# Altium PCB EFR32xG27_BLE_AGR_REF_DES_A00.PcbDoc (part 2 of 2)
Units mil, origin at the board's own origin, x right, y up, seen from the top; angles counter-clockwise.
Board outline 1488.66 x 1256.89 mil, 2 copper layers (Top Layer, Bottom Layer), stack 38.548 mil thick; 113 components, 68 nets, 277 pads, 490 vias.
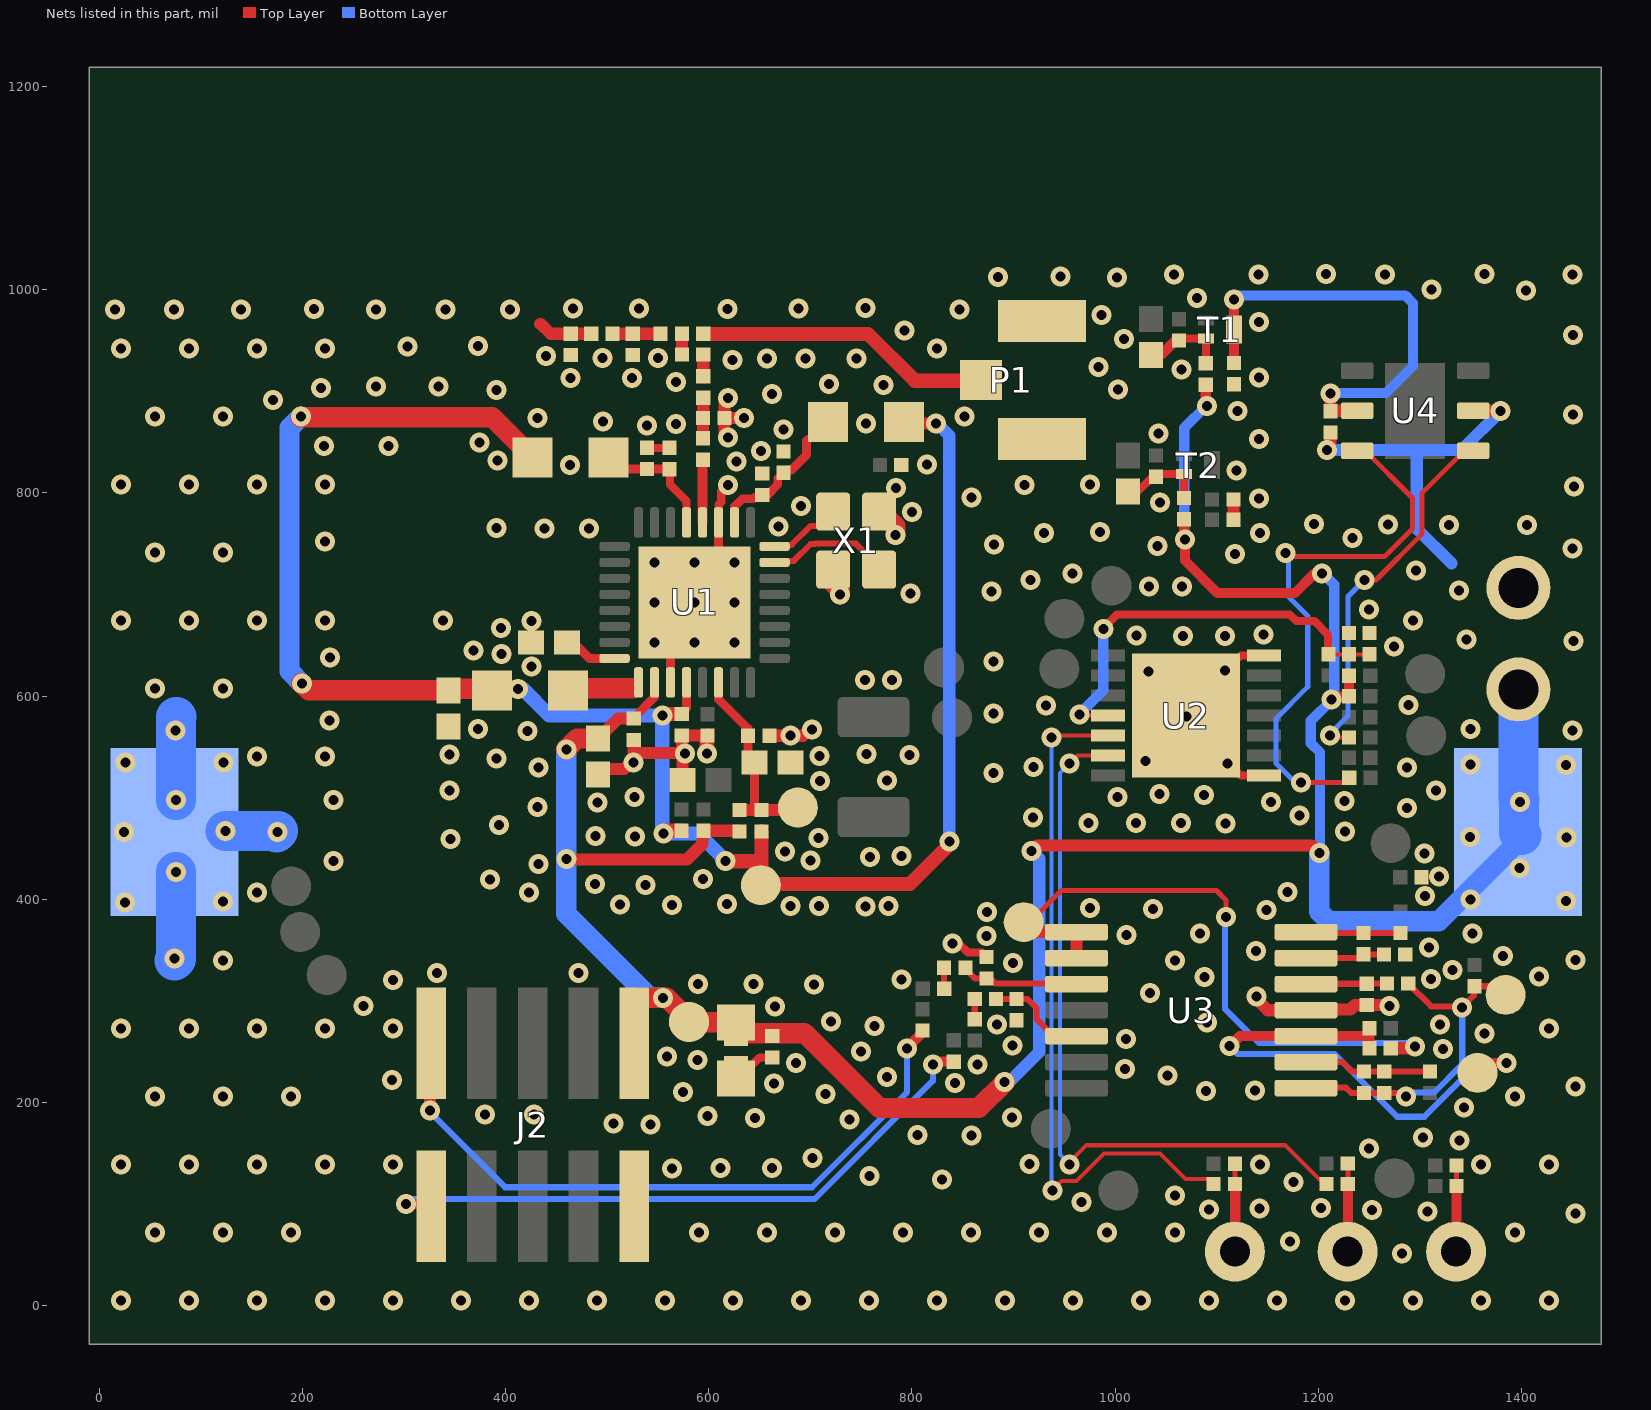
[diagram p2: the nets of this part, all layers, seen from the top]

## Via types
v1: diameter 19.68, hole 9.84, Top Layer to Bottom Layer, tented both sides, 413 vias
v2: diameter 19.68/19.68 (per signal layer), hole 9.84, Top Layer to Bottom Layer, tented both sides, 77 vias

## Nets (pads, with @x,y where several pads share a name; then routed paths per layer and width w, separated by ;. In a path a pad name is that pad's centre, name@x,y a point inside that pad or via, vN(x,y) a via of type N, cw(c..) or ccw(c..) an arc to the next point about the centre after c; other vN are vias at no path point) (continued)
GND: BATT.2 C1.2 C4.2 C5.2 C6.2 C7.2 C8.2 C9.2 C10.2 C11.2 C12.2 C13.2 C14.2 C15.2 C16.2 C17.2 C18.2 C19.2 C20.2 C21.2 C22.2 C23.2 C24.2 C25.2 C25[2].2 C26.2 C27.1 C31.2 J1.1 J2.2 P1.1 P1.3 R11.1 R35.1 R39.1 R43.1 U1.0 U1.11 U1.27 U2.1 U2.7 U2.15 U3.11 U4.2 X1.2 X1.4 | length 1559.2
  Top Layer w4.92: v1@612.35,801.32 v1@614.26,803.23 ; v1@614.59,802.61 v1@614.67,802.53 ; v1(619.11,807.96) v1@625.85,807.96
  Top Layer w7: v1@614.67,802.53 615.42,802.53 v1@615.21,802.32
  Top Layer w8: C6.2@538.76,844.59 539.01,844.34 C7.2@560.43,844.34 ; C25.2@628.55,225.16 630.94,225.16 650.13,244.35 C18.2@662.58,244.35 ; C5.2@649.71,822 C5.2@652.71,819 ; v1@652.71,836.67 v1@652.77,836.73 ; v1@846.02,356.75 855.25,347.52 868.88,347.52 C31.2@873.32,343.08 ; U2.15@1069.66,585.92 1123.62,639.88 U2.7@1146.47,639.88 ; U2.15@1111.15,534.33 1123.71,521.77 U2.1@1146.47,521.77
  Top Layer w8.5: U1.11@609.71,778.83 609.71,788.47 612.35,791.11 v1@612.35,801.32
  Top Layer w8.66: U1.27@562.29,613.69 562.29,668.81 609.7,716.22 U1.11@609.7,760.3 ; U1.11@609.68,760.32 U1.11@609.68,770.95
  Top Layer w12: C14.2@344.32,571.27 C14.2@344.53,571.48 ; C8.2@490.98,528.18 516.86,528.18 v1@525.84,537.16 ; v1@524.59,538.47 v1@525.31,539.19 ; v1@526.19,538.31 531.9,544.02 v1@576.06,544.02 ; v1@526.28,540.16 C9.2@526.28,556.85 ; C7.2@560.43,844.34 C7.2@560.55,844.22 ; C15.2@573.46,561.29 C15.2@573.6,561.29 ; C10.2@574.2,517.34 574.2,541.23 v1@575.79,542.82 ; v1(576.69,543.73) 576.59,543.73 576.47,543.61 v1@576.06,544.02 ; C11.2@599,561.13 598.84,561.29 C15.2@573.6,561.29 ; v1@619.17,894.61 615.44,890.88 C1.2@615.44,873.7 ; v1@619.28,854.02 615.44,857.86 C1.2@615.44,873.7 ; v1@635.1,874.54 634.26,873.7 C1.2@615.44,873.7 ; C13.2@659.7,560.91 692.76,560.91 v1@696.1,564.25 ; R43.1@1116.41,793.6 1116.41,774.23 C26.2@1117,773.64 ; v1(1139.31,304.14) 1139.31,301.85 1150.32,290.84 U3.11@1187.18,290.84 ; U3.11@1188.38,291.44 1231.59,291.44 1236.04,295.89 C27.1@1247.59,295.89 1269.74,295.89 v1@1270.3,295.33 ; v1@1208.22,841.15 1211.87,844.8 C22.2@1211.87,859.34 ; R35.1@1285.4,346.17 R35.1@1285.94,345.63 ; v1@1308.59,352.63 v1(1308.78,352.38) v1(1308.78,352.38) ; U4.2@1352.39,880.84 v1(1379.55,880.78) v1@1381.08,882.33 ; C15.2@573.6,561.29 573.6,546.48 v1@576.06,544.02
  Top Layer w14.02: v1(598.07,543.51) 598.07,560.31 597.95,560.43 C11.2@598.71,561.19
  Top Layer w19.68: X1.4@721.74,727.86 721.74,712.11 729.31,704.54 v1(729.31,699.88) ; X1.2@766.52,784.46 783.76,767.22 v1(783.76,758.57)
  Bottom Layer w12: v1(1208.42,842.37) 1341.11,842.37 v1@1379.96,881.22 ; 1297.43,841 1296.95,840.52 1296.95,764.78 1331.05,730.68
  Bottom Layer w39.37: v1@74.37,339.88 75.62,341.13 v1(75.62,427.02) ; v1(75.62,497.89) 75.62,579.19 76.01,579.58 ; v1(124.31,467.01) 173.38,467.01 174.66,465.73 v1@176.16,467.23
  other v1: 1282.54,51.6 1172.19,63.32 1453.28,90.7 1307.3,92.51 1252.88,94.23 1092.23,94.6 1142.34,95.88 1202.81,96.07 966.7,102.06 1059.18,108.61 1175.67,121.86 829.58,124.04 758.22,127.87 563.92,134.82 611.67,135.42 662.51,135.69 1142.53,139.1 915.61,139.39 702.09,145.48 1250.11,154.87 1338.73,162.62 1303.11,165.75 805.54,168.12 858.77,167.41 542.6,178.17 506.48,179.23 738.8,183.38 645.76,184.93 898.59,185.17 598.66,186.67 379.64,188.3 428.15,188.38 1343.36,195.13 714.95,208.38 574.62,210.12 1089.26,211.45 1137.9,211.63 1453.28,215.56 664.36,218.65 842.2,219.12 288.06,222.28 775.43,225.02 1051.38,226.61 1009.8,233.13 864.48,237.62 685.88,239.01 588.77,241.72 559.12,245.21 749.95,250.36 1322.71,252.46 899.11,256.06 1010.5,262.56 1363.51,267.82 763.32,275.26 883.59,276.95 1319.99,276.78 1090.47,278.67 720.56,279.89 260.04,295.06 665.05,294.43 1270.13,295.12 1034.2,307.93 703.5,316.06 589.45,316.86 644.23,316.86 289.27,320.32 789.77,320.91 1311.04,321.36 1087.82,323.29 1417.01,324.22 332.47,327.44 471.93,327.36 1331.84,330.4 899.67,337.2 1453.28,340.43 74.04,341.79 1381.93,344 1138.43,349.08 840.09,356.6 873.22,364.07 1011.1,364.95 1083.71,366.18 1351.69,366.29 873.91,387.33 1037.44,390.23 1148.77,389.34 975.16,391.21 754.48,393.08 680.35,393.44 708.76,393.44 777.01,393.44 512.9,394.96 563.96,394.53 618.08,395.25 25.67,397.06 121.82,397.99 1304.84,403.4 1169.55,406.94 537.63,413.87 488.16,414.89 384.58,419.59 594.37,419.84 1319.02,422.47 432.5,434.94 230.66,437.65 700.13,437.99 758.71,441.82 789.81,442.46 1304.27,444.83 675.01,447.18 345.65,459.3 708.19,460.29 527.66,461.98 488.55,462.35 24.47,466.23 175.8,466.03 1226.41,466.5 393.72,473.11 974.03,474.85 1020.78,475.14 1064.76,475.14 1108.74,474.56 919.37,480.48 1181.43,482.24 1287.36,489.66 431.71,490.68 490.59,495.08 1153.4,495.59 1225.78,496.97 230.66,497.83 526.94,500.62 1002.3,500.54 1087.47,502.66 1043.5,503.83 344.97,506.91 1315.91,507.28 709.46,516.58 775.29,517.08 880.38,524.12 432.5,529.87 919.67,530.12 1287.19,529.49 1110.76,533.89 25.87,534.66 122.51,534.86 526.1,534.56 1029.74,536.01 391.09,538.68 709.1,540.86 797.4,542.06 344.99,542.44 755.11,543.02 680.35,561.12 421.4,565.49 75.03,566.33 1450,566.37 372.82,567.58 701.69,567.36 1349.58,567.64 226.61,575.79 1070.44,580.01 880.38,582.75 931.93,590.83 1288.54,591.27 753.94,616.03 780.6,615.92 1032.65,624.4 1108.24,625.18 425.51,629 880.06,634.01 227.23,638.16 395.85,641.39 368.73,644.66 1274.39,648.94 546.69,652.84 586.06,652.84 625.43,652.84 1451.02,654.32 1345.71,655.72 1066.58,658.93 1108.07,659.05 1021.23,659.65 1146.19,660.49 395.35,666.96 425.5,673.94 338.58,674.59 1249.95,685.31 546.69,692.21 586.06,692.21 625.43,692.21 798.42,701.1 878.14,702.98 1338.69,703.93 1033.34,707.69 1065.89,707.69 916.55,714.51 958.03,720.67 1296.26,723.64 546.69,731.58 586.06,731.58 625.43,731.58 1118.22,739.64 1450.22,745.44 1041.71,747.72 880.81,749.4 222.56,752.29 1233.58,755.55 929.95,760.46 1142.75,760.64 985.05,761.74 438.33,764.99 482.29,765.11 391.06,765.58 668.89,767.06 1268.69,769.12 1328.38,768.49 1405.62,768.35 1195.67,769.35 800.22,781.07 690.73,786.92 1044,790.71 1141.62,794.4 858.68,795.34 784.11,804.86 1451.47,806.35 910.81,807.68 975.27,808.32 1119.61,822.24 463.58,827.4 814.97,828.09 627.29,830.78 392.22,832.11 651.45,841.32 221.36,846.17 284.87,845.98 374.5,849.74 1141.61,853.13 618.79,854.34 1042.74,858.65 673.49,862.29 539.45,866.3 568.03,867.98 754.78,868.44 496.15,870.34 431.44,873.67 634.96,873.49 851.62,875.32 1450.53,877.01 1120.55,880.75 171.03,891.44 618.79,893.19 662.24,897.18 390.9,901.21 1002.71,901.8 218.4,903.23 272.3,904.53 334.27,904.6 718.48,907.3 772.02,906.34 567.96,908.95 463.97,913.33 524.72,913.33 1141.84,913.74 1065.46,921.67 983.79,923.75 623.25,930.7 695.22,932.29 495.63,932.63 550,932.6 657.14,932.5 745.42,932.5 439.77,934.69 303.61,944.07 372.7,944.63 1008.76,951.37 1450.52,955.4 792.51,959.64 1141.85,968.27 986.56,975.05 15.62,980.66 73.51,980.66 139.84,980.66 211.58,980.87 272.74,980.59 340.98,980.59 404.33,980.66 618.47,981.15 846.93,980.66 466.42,981.44 531.26,981.73 688.41,981.73 754.1,982 1080.37,991.76 1404.51,998.98 1311.5,1000.21 884.93,1012.26 1001.63,1011.86 946.36,1013.01 1058.01,1015.18 1140.96,1015.16 1265.49,1015.14 1450.4,1014.98 1207.44,1015.42 1363.55,1015.51
  other v2: 21.34,5.26 88.27,5.26 155.2,5.26 222.13,5.26 289.06,5.26 355.98,5.26 422.91,5.26 489.84,5.26 556.77,5.26 623.7,5.26 690.63,5.26 757.56,5.26 824.49,5.26 891.42,5.26 958.35,5.26 1025.28,5.26 1092.2,5.26 1159.13,5.26 1226.06,5.26 1292.99,5.26 1359.92,5.26 1426.85,5.26 54.8,72.19 121.73,72.19 188.66,72.19 590.24,72.19 657.17,72.19 724.09,72.19 791.02,72.19 857.95,72.19 924.88,72.19 991.81,72.19 1058.74,72.19 1393.39,72.19 21.34,139.12 88.27,139.12 155.2,139.12 222.13,139.12 289.06,139.12 1359.92,139.12 1426.85,139.12 54.8,206.05 121.73,206.05 188.66,206.05 1393.39,206.05 21.34,272.98 88.27,272.98 155.2,272.98 222.13,272.98 289.06,272.98 1426.85,272.98 121.73,339.91 1058.74,339.91 155.2,406.84 422.91,406.84 155.2,540.7 222.13,540.7 54.8,607.63 121.73,607.63 21.34,674.56 88.27,674.56 155.2,674.56 222.13,674.56 1292.99,674.56 54.8,741.49 121.73,741.49 21.34,808.41 88.27,808.41 155.2,808.41 222.13,808.41 54.8,875.34 121.73,875.34 21.34,942.27 88.27,942.27 155.2,942.27 222.13,942.27 824.49,942.27
IOVDD: C12.1 C13.1 R4.2 R5.2 TP2.1 U1.30 | length 196.9
  Top Layer w8.66: U1.30@609.53,613.69 609.53,597.15 638.7,567.98 C13.1@638.7,561.93 ; C13.1@638.7,560.91 638.7,540.66 C12.1@644.37,534.99 ; C12.1@644.52,533.68 645.11,533.09 R5.2@645.11,488.61
  Top Layer w12: R4.2@630.21,487.85 651.84,487.85 R5.2@651.93,487.76 ; R5.2@652.03,487.86 684.86,487.86 TP2.1@688.3,491.3
NetC1_1: C1.1 L1.2 L2.1 | length 40.5
  Top Layer w12: C1.1@594.02,874.03 594.53,874.54 L2.1@594.53,893.7 ; L1.2@594.44,853.71 C1.1@594.44,873.7 594.44,874.21 C1.1@594.5,874.27
NetC4_1: C4.1 C5.1 L4.2 U1.10 | length 118.3
  Top Layer w8.66: U1.10@625.43,771.17 625.43,786.49 633.19,794.25 643.74,794.25 644.82,795.33 650.04,795.33 C5.1@652.71,798 ; C5.1@657.47,797.71 668.04,808.28 668.04,814.15 C4.1@673.61,819.72 ; C4.1@676.28,822.39 681.22,822.39 696.35,837.52 696.35,851.36 697.83,852.84
NetC6_1: C6.1 C7.1 L5.2 U1.13 | length 119.1
  Top Layer w8: C7.1@561.39,824.74 561.39,822.63 561.86,822.17 561.86,808.08 578.07,791.87 U1.13@578.07,776.96
  Top Layer w8.66: L5.2@501.37,834.25 512.15,823.47 C6.1@539.21,823.47 560.77,823.47 C7.1@561.13,823.11
NetC16_1: C16.1 U1.24 | length 51.7
  Top Layer w8.66: C16.1@461.56,651.35 468.32,651.35 482.58,637.09 U1.24@507.32,637.09
NetC17_1: C17.1 L3.1 R1.2 | length 49.7
  Top Layer w12: L3.1@505.42,956.6 C17.1@525.49,956.6 ; C17.1@524.59,957.38 525.31,956.66 R1.2@552.24,956.66 ; R1.2@552.08,956.5 R1.2@552.24,956.66 ; R1.2@552.58,956.66 R1.2@552.24,956.66 ; R1.2@553.04,957.46 R1.2@552.24,956.66
NetC19_1: C19.1 L3.2 | length 51.7
  Top Layer w12: 434.28,966.33 434.77,966.33 444.48,956.62 C19.1@464.3,956.62 L3.2@482,956.62
NetC23_1: C23.1 R12.2 U3.5 | length 102.2
  Top Layer w6: R12.2@883.12,302.82 883.99,301.95 C23.1@902.92,301.95 913.56,301.95 922.66,292.85 922.66,282.02 939.51,265.17 U3.5@963.34,265.17
NetC27_2: C27.2 R19.2 U3.12 | length 79.1
  Top Layer w6: U3.12@1189.46,316.47 1189.88,316.89 C27.2@1247.59,316.89 ; C27.2@1246.87,317.07 1246.93,317.01 R19.2@1267.6,317.01
NetC28_1: C28.1 R17.1 R33.2 U3.9 | length 127.8
  Top Layer w6: U3.9@1185.52,239.84 1223.82,239.84 1233.21,230.45 R17.1@1244.96,230.45 1264.6,230.45 C28.1@1264.73,230.32 ; C28.1@1264.84,230.42 1309.38,230.42 R33.2@1309.47,230.51
NetC28_2: C28.2 R17.2 R18.1 R19.1 TP20.1 U3.8 | length 360.5
  Top Layer w6: U3.8@1186.29,214.68 1227.1,214.68 1232.33,209.45 R17.2@1244.96,209.45 C28.2@1264.84,209.42 C28.2@1264.95,209.53 ; C28.2@1264.84,209.42 1282.86,209.42 v1@1285.84,206.44 ; R19.1@1288.6,317.01 1311.02,294.59 v1@1341.55,294.59 ; v1(1341.52,293.73) 1353.23,305.44 R18.1@1353.23,314.87 ; R18.1@1353.61,314.38 1376.49,314.38 TP20.1@1384.53,306.34 ; TP20.1@1385.62,296.64 TP20.1@1392.37,303.39
  Bottom Layer w6: v1@1285.93,205.44 1290.14,209.65 1313.87,209.65 1341.7,237.48 1341.7,293.55 v1(1341.52,293.73)
  other v1: 1286.17,205.78
NetC29_1: C29.1 R40.2 R41.1 T1.S | length 87.8
  Top Layer w8: R40.2@1061.05,951.83 R40.2@1063.14,951.83 ; R40.2@1061.57,950.26 R40.2@1063.14,951.83 ; R41.1@1089.1,927.09 1089.45,927.44 T1.S@1089.45,951.83 R40.2@1063.14,951.83
  Top Layer w10: C29.1@1035.52,935.59 1044.81,935.59 R40.2@1061.05,951.83
NetC30_1: C30.1 R42.2 R44.1 T2.S | length 85.4
  Top Layer w8: C30.1@1012.78,801.38 1022.32,801.38 1037.26,816.32 R42.2@1041.06,816.32 ; R42.2@1040.43,816.95 1042,818.52 T2.S@1067.85,818.52 1067.85,795.94 R44.1@1068.05,795.74
NetC31_1: C31.1 R13.2 U3.3 | length 120.1
  Top Layer w6: R13.2@852.48,333.45 R13.2@853.38,332.55 ; R13.2@852.7,332.52 852.7,331.66 862.37,321.99 872.92,321.99 C31.1@873.25,322.32 ; C31.1@873.58,321.67 877.82,321.67 882.45,317.04 964.29,317.04 U3.3@964.78,316.55
NetCC1_1: CC1.1 L2.2 | length 22.9
  Top Layer w12: CC1.1@594.59,936.22 594.59,913.91 L2.2@595.03,913.47
NetCC1_2: CC1.2 R1.1 R2.1 | length 21.1
  Top Layer w12: CC1.2@573.55,935.85 573.6,935.9 R2.1@573.6,956.67 R1.1@573.75,956.52
NetCE_1: CE.1 R16.2 R37.2 | length 85.3
  Top Layer w4.92: R16.2@1335.99,117.9 R37.2@1335.99,138.08
  Top Layer w10: CE.1@1335.93,52.79 1335.99,52.85 R16.2@1335.99,117.9
NetL1_1: L1.1 U1.12 | length 62.1
  Top Layer w10: U1.12@593.94,770.95 593.94,832.01 L1.1@594.68,832.75
NetL6_1: L6.1 U1.25 | length 68.6
  Top Layer w8.66: L6.1@461.59,605.66 L6.1@463.55,607.62 ; 525.02,607.62 U1.25@528.07,610.67
  Top Layer w20: L6.1@463.55,607.62 525.02,607.62
NetP1_2: P1.2 R2.2 | length 293.7
  Top Layer w14.02: R2.2@595.62,956.51 756.67,956.51 802.69,910.49 P1.2@870.23,910.49
NetR15_2: R15.2 R38.2 RE.1 | length 85.9
  Top Layer w4.92: R15.2@1229.04,139.85 1229.04,121.84 R38.2@1230.1,120.78
  Top Layer w10: RE.1@1228.99,53.5 1229.06,53.57 R38.2@1229.06,119.82
NetR25_1: R25.1 TP15.1 U3.1 U3.2 | length 629.1
  Top Layer w5: TP15.1@915.56,376 915.56,377 947.11,408.55 1099.82,408.55 1109.01,399.36 v1@1109.01,383.48
  Top Layer w6: U3.1@961.97,367.69 U3.1@966.27,371.99
  Top Layer w12: TP15.1@910.74,377.81 920.86,367.69 U3.1@961.97,367.69 961.97,343.91 U3.2@962.85,343.03 ; R25.1@1271.3,253.37 v1@1293.73,253.37
  Bottom Layer w5: v1@1109.16,382.61 v1(1109.31,382.76)
  Bottom Layer w6: v1@1108.52,383.25 1108.18,382.91 1108.18,291.99 1141.65,258.52 1292.79,258.52 v1@1294.83,256.48
  other v1: 1295.27,254.9
NetR25_2: R25.2 R32.2 TP18.1 U3.10 | length 511.3
  Top Layer w10: v1@1113.01,255.83 1122.51,265.33 U3.10@1187.95,265.33 1248.94,265.33 R32.2@1250.3,266.69 ; R25.2@1250.3,253.37 R32.2@1250.3,266.69 ; R32.2@1250.37,266.76 R32.2@1250.3,266.69 ; TP18.1@1357.28,228.26 1367.94,238.92 v1(1385.39,238.92)
  Bottom Layer w6: v1(1112.66,255.48) 1120.5,247.64 1215.97,247.64 1277.61,186 1304.36,186 1357.62,239.26 v1@1385.39,239.26
NetR26_2: R26.2 R36.2 WE.1 | length 86.8
  Top Layer w4.92: R26.2@1117.97,139.8 1117.97,120.53 R36.2@1118.32,120.18
  Top Layer w10: R36.2@1117.97,119.7 1118.28,119.39 WE.1@1118.28,52.79
NetR27_1: R27.1 R34.2 U3.14 | length 90.9
  Top Layer w6: U3.14@1190.72,367.41 1191.21,366.92 R34.2@1244.58,366.92 1279.52,366.92 R27.1@1280.89,365.55
NetR34_1: R34.1 R35.2 U3.13 | length 78
  Top Layer w6: U3.13@1188.53,342.36 1241.02,342.36 R34.1@1244.43,345.76 ; R34.1@1244.11,346.08 R34.1@1244.43,345.76 ; R35.2@1264.61,345.67 1244.52,345.67 R34.1@1244.43,345.76
NetU1_7: U1.7 X1.3 | length 119.4
  Top Layer w5.91: U1.7@664.65,731.8 666.03,733.18 683.75,733.18 700.3,749.73 704.46,749.73 704.84,750.11 744.76,750.11 754.23,740.64 754.23,740.18 766.55,727.86 X1.3@767.01,727.86
NetU1_8: U1.8 X1.1 | length 65.7
  Top Layer w5.91: U1.8@664.65,747.55 666.03,748.92 681.55,748.92 681.85,749.22 ; 680.54,749.22 681.85,749.22 ; X1.1@720.87,767.35 699.98,767.35 681.85,749.22
PTI_DATA: J2.10 R24.2 | length 631.6
  Top Layer w10: v1(301.92,100.01) J2.10@326.69,100.01 ; v1@820.75,237.39 823.56,240.2 R24.2@841.11,240.2
  Bottom Layer w6: v1@301.47,100.42 305.95,104.9 704.12,104.9 820.62,221.4 v1(820.62,237.42)
PTI_FRAME: J2.9 R46.2 | length 682.7
  Top Layer w10: v1@795.37,253.8 810.55,268.98 R46.2@810.55,270.79
  Top Layer w12: v1(325.65,192.35) 325.65,265.65 J2.9@327.31,267.31
  Bottom Layer w6: v1@326.86,192.83 329.26,190.43 329.26,186.85 399.53,116.58 701.66,116.58 795.25,210.17 v1(795.25,253.13)
PWM0: R12.1 R14.2 | length 21
  Top Layer w6: R14.2@861.46,281.16 861.85,281.55 R12.1@861.85,301.98
PWM1: R13.1 R45.2 | length 20.7
  Top Layer w6: R13.1@831.7,332.52 831.7,312.21 R45.2@831.99,311.92
RE: R38.1 U2.13 | length 719.5
  Top Layer w4: v1(955.32,138.73) 955.32,141.28 971.98,157.94 1167.4,157.94 1205.1,120.24 R38.1@1207.6,120.24 ; v1@956.07,534.35 963.18,541.46 U2.13@992.93,541.46
  Bottom Layer w4: v1@955.14,139.33 945.6,148.87 945.6,524.13 v1(955.19,533.72)
RHT_SCL: R28.2 U4.6 | length 546.6
  Top Layer w5: v1@1168.11,741.08 1171.94,737.25 1265.16,737.25 1292.66,764.75 1292.66,795.01 1246.14,841.53 U4.6@1243.73,841.53 ; v1(1182.9,515.15) 1226.77,515.15 R28.2@1230.64,519.02
  Bottom Layer w5: v1@1166.36,740.3 1170.82,735.84 1170.82,697.49 1189.57,678.74 1189.57,609.07 1158.51,578.01 1158.51,533.76 1177.02,515.25 v1@1183.09,515.25
  other v1: 1167.52,740.69
RHT_SDA: R30.2 U4.1 | length 370.3
  Top Layer w4: v1@1212.09,561.17 1214.07,559.19 R30.2@1230.1,559.19
  Top Layer w5: v1@1245.48,714.33 1256.71,714.33 1302.25,759.87 1302.25,800.19 U4.1@1343.53,841.47
  Top Layer w6: U4.1@1343.53,841.47 U4.1@1352.39,841.47
  Bottom Layer w5: v1@1209.61,560.81 1229.33,580.53 1229.33,697.96 v1(1245.56,714.19)
  other v1: 1211.46,561.39
RHT_VCC: C22.1 R39.2 T1.D U4.5 | length 440.2
  Top Layer w10: T1.D@1116.46,960.1 1116.93,959.63 R39.2@1116.93,927.9 ; v1(1116.93,990.4) 1116.93,960.05 T1.D@1117.19,959.79
  Top Layer w12: C22.1@1211.87,880.34 1211.87,896.5 v1@1212.39,897.02 ; C22.1@1212.41,880.8 1212.45,880.84 U4.5@1238.22,880.84
  Bottom Layer w10: v1(1116.93,990.4) v1@1119.11,990.4 ; v1@1118.85,994.56 v1@1119.01,994.4 ; v1@1119.11,994.4 1285.46,994.4 1293.18,986.68 1293.18,924.91 1266.65,898.38 v1@1211.2,898.38
  other v1: 1212.19,897.81
VDCDC: C14.1 C15.1 L4.1 L5.1 L6.2 R5.1 R7.1 TP3.1 U1.28 | length 1893.6
  Top Layer w8.66: C15.1@573.21,583.21 578.04,588.04 U1.28@578.04,613.69
  Top Layer w12: L4.1@792.96,868.87 793.54,868.29 v1(823.69,868.29)
  Top Layer w14.02: v1@552.23,580.06 v1@554.25,582.08 ; v1(554.35,581.01) 555.71,582.37 C15.1@570.16,582.37 ; v1@554.89,464.31 558.03,467.45 R7.1@573.18,467.45 ; v1(616.51,437.47) 646.83,437.47 TP3.1@652.03,432.27 ; TP3.1@649.56,411.06 TP3.1@652.03,413.53 ; R5.1@652.03,466.86 TP3.1@652.03,432.27 ; TP3.1@652.41,413.91 TP3.1@652.03,413.53 ; TP3.1@652.43,426.54 TP3.1@652.03,426.94 ; TP3.1@654.97,416.47 656.46,414.98 798.24,414.98 836.57,453.31 v1@836.57,457.92 ; TP3.1@652.03,413.53 TP3.1@652.03,426.94 ; TP3.1@652.03,426.94 TP3.1@652.03,432.27
  Top Layer w16: L6.2@393.84,607.87 394.54,607.17 v1(412.27,607.17)
  Top Layer w20: v1@198.55,874.43 198.59,874.39 386.88,874.39 L5.1@426.37,834.9 ; v1@198.97,612.76 206.11,605.62 C14.1@343.69,605.62 345.39,607.32 384.84,607.32 L6.2@386.08,608.56 ; C14.1@342.06,607.83 C14.1@343.79,606.1 ; L6.2@386.79,605.66 L6.2@387.19,606.09
  Bottom Layer w12: v1@822.81,869.31 823.91,869.31 836.75,856.47 836.75,458.07 v1@835.82,457.14
  Bottom Layer w14.02: v1(412.27,607.17) 416.87,607.17 443.03,581.01 v1(554.35,581.01) 554.35,464.49 v1@555.38,463.46 ; v1(555.54,464.7) 589.91,464.7 v1@616.93,437.68
  Bottom Layer w20: v1(198.59,875.16) 187.42,863.99 187.42,624.43 v1@200.13,611.72
  other v1: 837.23,456.77 199.73,612.38
VMCU: BATT.1 C8.1 C9.1 C18.1 C25.1 C25[2].1 J1.2 J2.1 R4.1 R6.1 R22.2 R23.2 R41.2 R44.2 TP1.1 U1.26 | length 2698.7
  Top Layer w8.66: C8.1@491.72,558.76 C8.1@491.72,559.5 ; C9.1@526.07,577.85 526.07,578.43 546.54,598.9 U1.26@546.54,613.69
  Top Layer w10: R44.2@1067.92,774.04 1067.92,755.72 v1@1069.32,754.32 ; v1@1068.7,753.85 1068.7,733.41 1100.66,701.45 1177.04,701.45 1196.03,720.44 v1(1203.82,720.44) ; R41.2@1089.27,906.54 1089.27,887.59 v1@1091.18,885.68 ; v1(1212.98,596.64) 1216.06,599.72 R23.2@1230.16,599.72 ; R23.2@1230.14,599.74 R22.2@1230.14,620.08
  Top Layer w12: v1@458.5,439.29 578.74,439.29 593.93,454.48 593.93,466.49 R6.1@594.84,467.4 629.08,467.4 R4.1@629.64,466.84 ; C8.1@490.73,557.67 510.91,577.85 526.07,577.85 C9.1@526.28,577.85 ; v1(917.74,447.55) 923.24,453.05 1193.34,453.05 v1@1200.86,445.53
  Top Layer w20: v1(459.88,547.61) 470.59,558.32 C8.1@491.23,558.35 ; J2.1@527.42,298.49 531.08,302.15 530.24,302.99 v1(554.91,302.99) 558.6,302.99 TP1.1@581.12,280.47 ; TP1.1@581.12,279.05 581.34,278.83 C25[2].1@626.84,278.83 ; C25.1@625.43,275.65 C25.1@631.31,269.77 ; C25.1@629.85,268.31 694.31,268.31 768,194.62 865.75,194.62 v1@891.25,220.12
  Bottom Layer w10: v1@1069.56,754.79 1068.05,756.3 1068.05,864 v1@1089.87,885.82 ; v1@1201.06,445.86 1201.74,446.54 1201.74,544.46 1192.62,553.59 1192.62,575.66 v1@1212.99,596.03 ; v1@1204.35,720.94 1215.67,709.62 1215.67,598.55 v1@1212.83,595.71
  Bottom Layer w12: v1(890.96,220.17) 895.9,220.17 925.37,249.64 925.37,278.57 ; v1@916.54,448.94 925.33,440.15 925.33,278.88
  Bottom Layer w20: v1@459.68,547.61 459.68,385.54 542.23,302.99 v1(554.91,302.99) ; v1(1200.92,445.77) 1200.92,387.84 1210.47,378.29 1318.53,378.29 1400.23,459.99 BATT.1@1400.23,462.28
  Bottom Layer w39.37: J1.2@1397,606.54 1397,499.18 BATT.1@1397.8,498.38 ; BATT.1@1397.71,495.98 1397.71,465.72 BATT.1@1400.14,463.29
  other v1: 1443.74,398.26 1349.99,399.67 1398.1,430.95 459.8,439.47 1349.29,461.17 1444.44,460.64 1398.41,495.98 1349.82,532.53 1443.91,532.35 1068.66,754.21 1090.22,885.44
VREF: C21.1 R10.1 R11.2 U2.11 | length 412.2
  Top Layer w4: v1@968.42,580.83 U2.11@992.93,580.83 ; R10.1@1209.97,641.14 1229.1,641.14 C21.1@1229.62,640.62 ; C21.1@1231.08,641.28 1231.24,641.12 R11.2@1250.4,641.12
  Top Layer w8: v1@988.12,666.54 1002.03,680.45 1171.84,680.45 1178.47,673.82 1196.05,673.82 1209.63,660.24 R10.1@1209.63,641.16
  Bottom Layer w10: v1(964.85,582.12) 988.32,605.59 v1@988.32,666.14
  other v1: 988.7,666.14
WE: R36.1 U2.12 | length 686.9
  Top Layer w4: v1@938.93,114.36 947.46,122.89 961.88,122.89 988.94,149.94 1044.07,149.94 1069.41,124.6 1092.82,124.6 R36.1@1097.52,119.9 ; v1@939.45,561.14 U2.12@992.93,561.14 ; R36.1@1094.58,119.7 R36.1@1096.97,119.7
  Bottom Layer w4: v1(937.6,559.04) 937.6,114.57 v1@938.15,114.02
  other v1: 938.14,113.6
pads on no net: U2.5 U2.10 U4.3 U4.4 U4.7

## Polygon pours and split planes (outlines as drawn)
GND on Top Layer "GND1" (solid, pour order 7): 1468.68,1026.47 1468.68,-27.65 0.01,-27.65 0.01,993.65 868.62,993.65 868.62,1026.47
no net on Top Layer "Top Layer-No Net" (solid, pour order 6): 232.57,1119.59
GND on Bottom Layer "GND1" (solid, pour order 10): 1468.68,1026.48 1468.68,-27.64 0.01,-27.64 0.01,993.66 868.62,993.66 868.62,1026.48

## Other copper
Top Layer:
  rectangle net GND: 1043.57,505.94 1091.09,532.77
  rectangle net GND: 1046.56,631 1094.08,657.83
  rectangle net GND: 108.17,956.3 126.59,1200.89
  rectangle: 108.18,1183.64 1196.17,1200.91
  rectangle net NetC19_1: 425.49,964.3 444.99,1194.12
  region net NetC19_1: 425.49,964.29 428.83,965.08 440.96,951.76
  pour cut-out: 608.33,912.1 608.32,833.64 647.54,854.89 647.54,896.49
  pour cut-out: 874.51,960.22 875.4,960.69 971.14,960.69 971.14,888.64 874.51,888.64
  region: 628.74,973.68
  region: 616.02,968.33
  region net NetP1_2: 847.03,930.73 865.26,930.73 865.26,891.36 846.4,891.36 801.72,910.91
  region: 839.88,932.17
  pour cut-out: 329.02,430.59
  pour cut-out: 329.02,430.59
  pour cut-out: -4435.35,-1034.1
  pour cut-out: 580.1,792.86 580.1,946.52 608.72,946.52 608.72,792.86
  pour cut-out: 1155.29,988.03 1428.42,988.03 1428.42,781.12 1155.29,781.12
Bottom Layer:
  rectangle net GND: 3.75,448.09 18.75,483.9
  region: 477.64,404.31
  region: 422.33,412.31
  pour cut-out: 1155.2,987.96 1428.33,987.96 1428.33,781.05 1155.2,781.05

## Silkscreen, mask and mechanical layers (free items; w line width, h text height)
Top Overlay:
  text "EFR32xG27_BLE_AGR_REF_DES_A00" at 584.23,1120.26 h30
M7 Board Outline:
  lines w3.94: 1159.07,801.12 ccw(c1173.83,801.12) 1173.83,786.36 ; 1159.07,801.12 ccw(c1173.83,801.12) 1173.83,786.36 ; 1159.07,801.12 1159.07,968.45 1159.07,801.12 ; 1173.83,786.36 1252.57,786.36 ; 1173.83,786.36 1252.57,786.36 ; 1173.83,983.21 ccw(c1174.01,968.27) 1159.07,968.09 cw(c1174.01,968.27) 1173.83,983.21 ; 1173.83,983.21 1252.57,983.21 1173.83,983.21 ; 1180.72,808.03 1252.57,808.03 ; 1180.72,808.03 1252.57,808.03 ; 1180.72,808.03 1180.72,961.57 ; 1180.72,808.03 1180.72,961.57 ; 1180.72,961.57 1252.57,961.57 1180.72,961.57 ; 1252.57,786.38 ccw(c1252.57,797.2) 1263.4,797.2 ; 1252.57,786.38 ccw(c1252.57,797.2) 1263.4,797.2 ; 1252.57,808.03 cw(c1252.57,797.2) 1263.4,797.2 ; 1252.57,808.03 cw(c1252.57,797.2) 1263.4,797.2 ; 1320.48,797.2 ccw(c1331.31,797.2) 1331.31,786.38 ; 1320.48,797.2 ccw(c1331.31,797.2) 1331.31,786.38 ; 1320.48,797.2 cw(c1331.31,797.2) 1331.31,808.03 ; 1320.48,797.2 cw(c1331.31,797.2) 1331.31,808.03 ; 1320.48,972.4 ccw(c1331.31,972.4) 1331.31,961.57 ; 1320.48,972.4 ccw(c1331.31,972.4) 1331.31,961.57 ; 1320.48,972.4 cw(c1331.31,972.4) 1331.31,983.23 ; 1320.48,972.4 cw(c1331.31,972.4) 1331.31,983.23 ; 1331.31,786.36 1410.05,786.36 ; 1331.31,786.36 1410.05,786.36 ; 1331.31,808.03 1403.16,808.03 ; 1331.31,808.03 1403.16,808.03 ; 1331.31,961.57 1403.16,961.57 ; 1331.31,961.57 1403.16,961.57 ; 1331.31,983.21 1410.05,983.21 ; 1331.31,983.21 1410.05,983.21 ; 1403.16,808.03 1403.16,961.57 ; 1403.16,808.03 1403.16,961.57 ; 1410.05,786.36 ccw(c1410.05,801.12) 1424.81,801.12 ; 1410.05,786.36 ccw(c1410.05,801.12) 1424.81,801.12 ; 1410.05,983.21 cw(c1410.05,968.45) 1424.81,968.45 ; 1410.05,983.21 cw(c1410.05,968.45) 1424.81,968.45 ; 1424.81,801.12 1424.81,968.45 ; 1424.81,801.12 1424.81,968.45 ; 1252.3,983.2 cw(c1251.61,972.99) 1261.82,972.3 ccw(c1251.61,972.99) 1252.3,983.2 ; 1252.4,961.54 ccw(c1251.96,971.42) 1261.83,971.85 cw(c1251.96,971.42) 1252.4,961.54
  lines w10: -9.95,-37.71 -9.95,1219.18 1478.71,1219.18 1478.71,-37.71 -9.95,-37.71
  text "Milling 0.55 mm (2 pcs)" at 917.78,1047.23 h25
Drill Drawing:
  drawing of 236 lines, arcs and shapes, not listed
  text "Fabrication Notes:" at -3316.59,3769.75 h70
  text "1. All dimensions in inches unless noted otherwise." at -3316.59,3669.75 h45
  text "2. All materials: laminates, resins, metallizations and soldermask to be compliant with RoHS and WEEE directives." at -3316.59,3594.75 h45
  text "3. Use 370 HR FR-4 or similar grade glass epoxy." at -3316.59,3519.75 h45
  text "4. Tg > 145 degrees C, glass transition temperature." at -3316.59,3446.5 h45
  text "5. TD > 350 degrees C, thermal decomposition." at -3316.59,3371.09 h45
  text "Layer" at 1180.04,3317.49 h45.9
  text "Name" at 1498.32,3317.49 h45.9
  text "Material" at 2214.28,3317.49 h45.9
  text "Thickness" at 2876.71,3317.49 h45.9
  text "Constant" at 3378.53,3317.49 h45.9
  text "Board Layer Stack" at 3819.18,3317.49 h45.9
  text "6. Minimum flammibility rating UL94V-0, maximum dissipation factor 0.025." at -3316.59,3292.25 h45
  text "1" at 1180.04,3225.69 h45.9
  text "Top Overlay" at 1498.32,3225.69 h45.9
  text "7. Adjust prepreg for 0.032\", +/- 0.003\" finished thickness measured over soldermask." at -3316.59,3199.2 h45
  text "2" at 1180.04,3133.89 h45.9
  text "Top Solder" at 1498.32,3133.89 h45.9
  text "Solder Resist" at 2214.28,3133.89 h45.9
  text "0,010mm" at 2876.71,3133.89 h45.9
  text "3,5" at 3378.53,3133.89 h45.9
  text "8. Copper thickness 0.0014\", (1 oz)." at -3316.59,3124.2 h45
  text "9. Hole size tolerance = +/- 0.003\" unless noted otherwise." at -3316.59,3049.2 h45
  text "3" at 1180.04,3042.09 h45.9
  text "Top Layer" at 1498.32,3042.09 h45.9
  text "Copper" at 2214.28,3042.09 h45.9
  text "0,036mm" at 2876.71,3042.09 h45.9
  text "10. Hole centers and pad centers to be concentric within 0.002\"." at -3316.59,2974.2 h45
  text "4" at 1180.04,2950.29 h45.9
  text "Dielectric 1" at 1498.32,2950.29 h45.9
  text "FR-4" at 2214.28,2950.29 h45.9
  text "0,908mm" at 2876.71,2950.29 h45.9
  text "4,48" at 3378.53,2950.29 h45.9
  text "11. Drill chart dimensions are finished hole sizes." at -3316.59,2899.2 h45
  text "5" at 1180.04,2858.49 h45.9
  text "Bottom Layer" at 1498.32,2858.49 h45.9
  text "Copper" at 2214.28,2858.49 h45.9
  text "0,036mm" at 2876.71,2858.49 h45.9
  text "12. Finish - immersion gold over nickel.  No exposed bare copper permitted." at -3316.59,2824.2 h45
  text "6" at 1180.04,2766.69 h45.9
  text "Bottom Solder" at 1498.32,2766.69 h45.9
  text "Solder Resist" at 2214.28,2766.69 h45.9
  text "0,010mm" at 2876.71,2766.69 h45.9
  text "3,5" at 3378.53,2766.69 h45.9
  text "13. Solder mask over bare copper, LPI clas 2 gen. industrial registration +/- 0.004." at -3316.59,2741.91 h45
  text "7" at 1180.04,2674.89 h45.9
  text "Bottom Overlay" at 1498.32,2674.89 h45.9
  text "14. No coverage on solder pads permitted." at -3316.59,2666.91 h45
  text "15. Refer to soldermask gerbers for tenting of vias." at -3316.59,2591.91 h45
  text "16. White silkscreen legend over green soldermask - both sides." at -3316.59,2516.91 h45
  text "17. Manufacturer icons not permitted on the silkscreen top layer." at -3316.59,2441.91 h45
  text "Symbol" at 1202.01,2381.31 h57.92
  text "Count" at 1615.21,2381.31 h57.92
  text "Hole Size" at 2101.66,2381.31 h57.92
  text "Plated" at 2688.57,2381.31 h57.92
  text "Hole Type" at 3101.77,2381.31 h57.92
  text "Drill Layer Pair" at 3698.33,2381.31 h57.92
  text "Pad Shape" at 4908.54,2381.31 h57.92
  text "18. PCB serialization/panel placement ID on silkscreen bottom." at -3316.59,2366.91 h45
  text "19. Full electrical test against IPC-356A netlist." at -3316.59,2291.91 h45
  text "490" at 1615.21,2260.65 h48.27
  text "0.250mm" at 2101.66,2260.65 h48.27
  text "PTH" at 2688.57,2260.65 h48.27
  text "Round" at 3101.77,2260.65 h48.27
  text "Top Layer - Bottom Layer" at 3698.33,2260.65 h48.27
  text "Rounded" at 4908.54,2260.65 h48.27
  text "3" at 1615.21,2139.98 h48.27
  text "0.750mm" at 2101.66,2139.98 h48.27
  text "PTH" at 2688.57,2139.98 h48.27
  text "Round" at 3101.77,2139.98 h48.27
  text "Top Layer - Bottom Layer" at 3698.33,2139.98 h48.27
  text "Rounded" at 4908.54,2139.98 h48.27
  text "2" at 1615.21,2019.32 h48.27
  text "1.000mm" at 2101.66,2019.32 h48.27
  text "PTH" at 2688.57,2019.32 h48.27
  text "Round" at 3101.77,2019.32 h48.27
  text "Top Layer - Bottom Layer" at 3698.33,2019.32 h48.27
  text "Rounded" at 4908.54,2019.32 h48.27
  text "495 Total" at 1615.21,1898.65 h48.27
  text "37.814 (mm)" at 438.43,1282.91 h60
  text "31.927 (mm)" at -101.81,289.85 h60 r90